# Altium PCB PCB1.PcbDoc
Units mil, origin at the board's own origin, x right, y up, seen from the top; angles counter-clockwise.
Board outline 2325 x 1445 mil, 2 copper layers (Top Layer, Bottom Layer); 34 components, 30 nets, 151 pads, 15 vias.
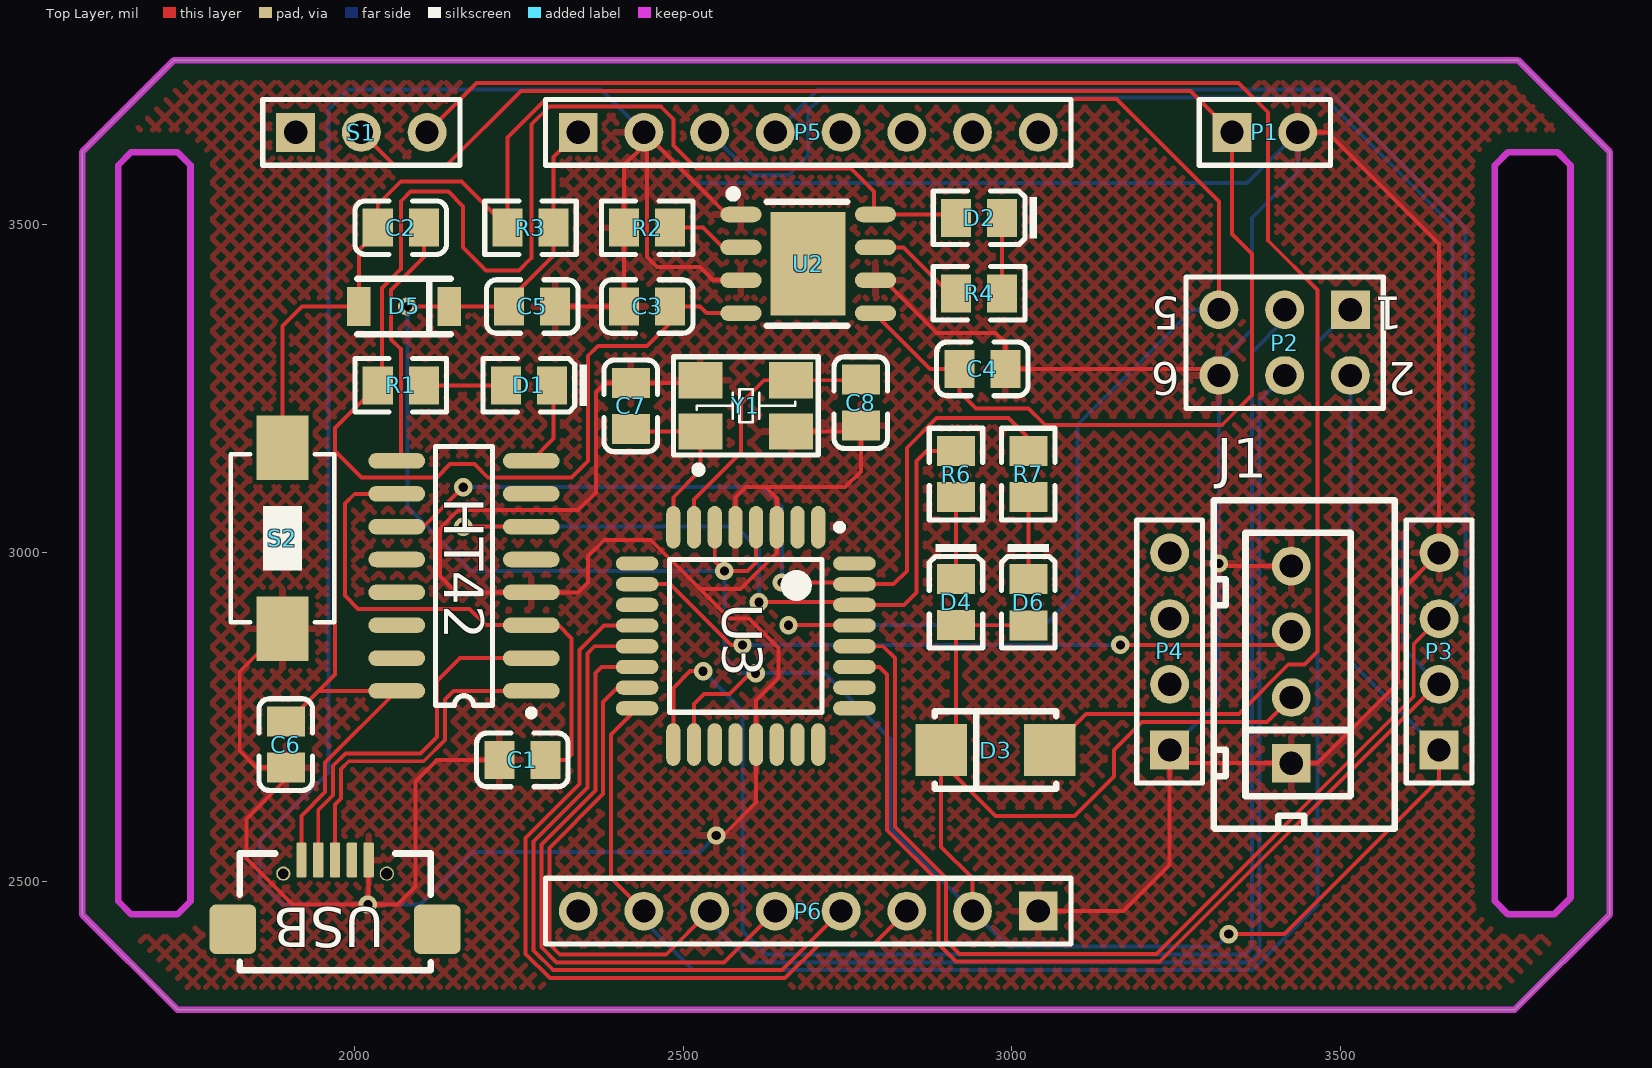
[diagram p0: Top Layer view]
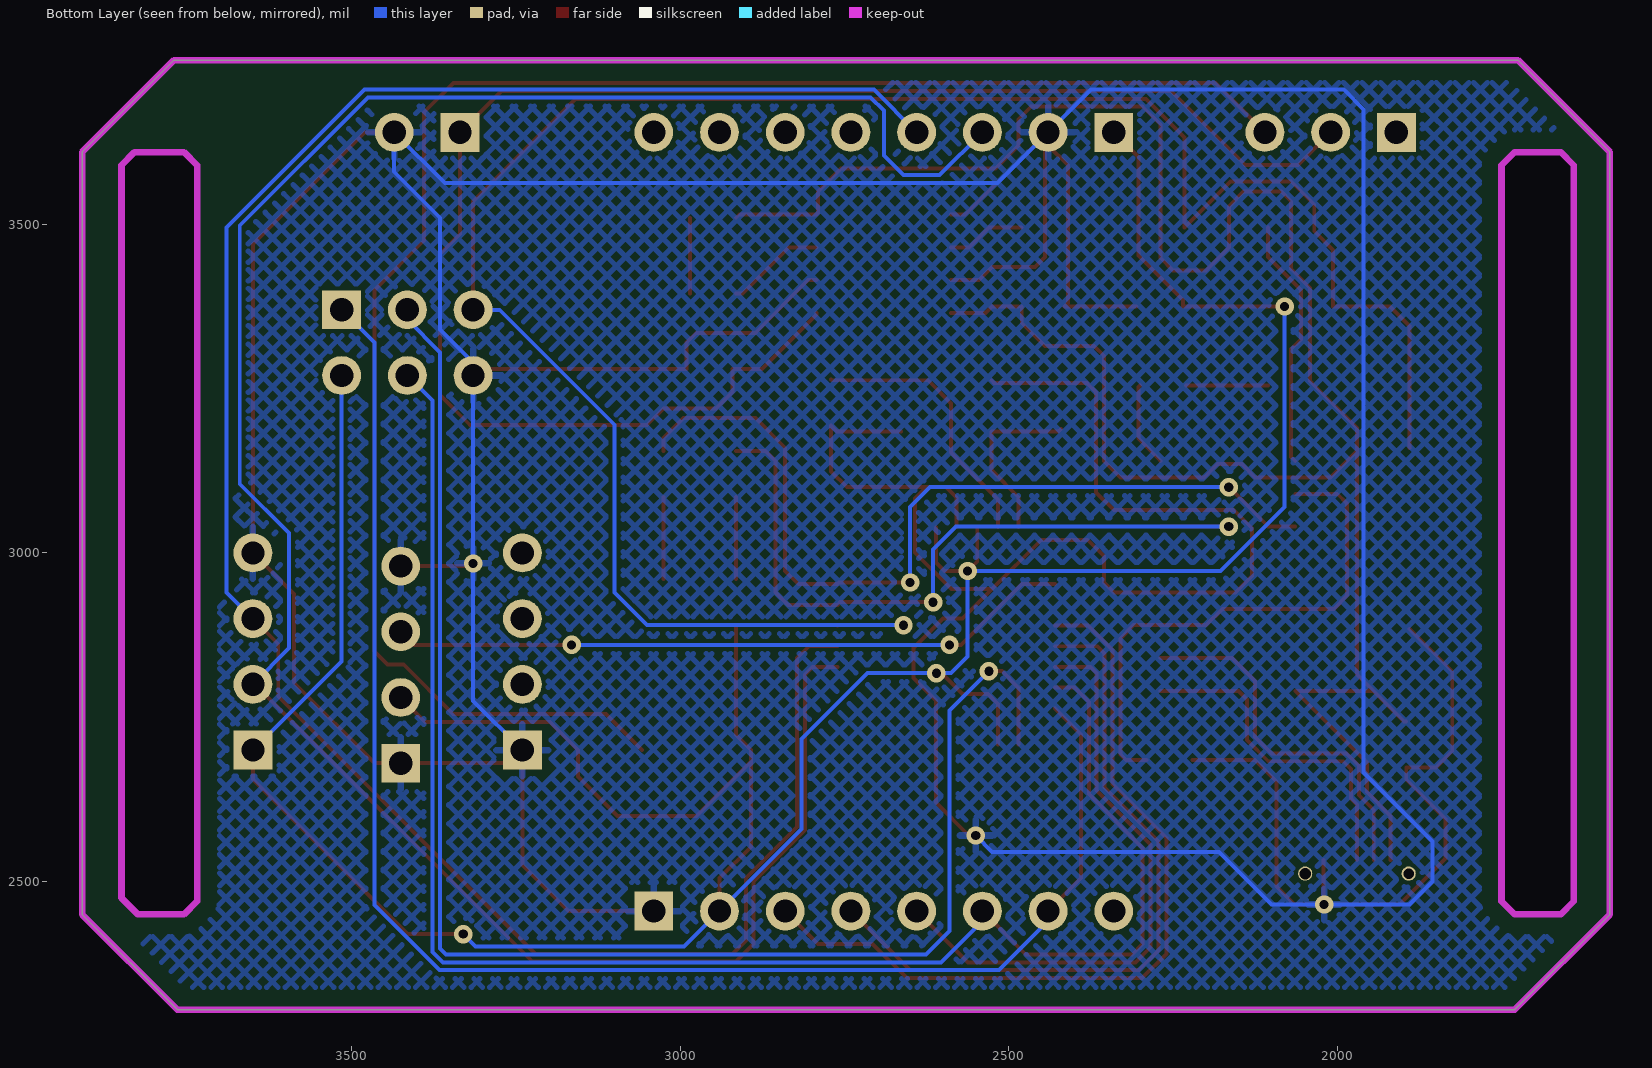
[diagram p1: Bottom Layer view, seen from below]
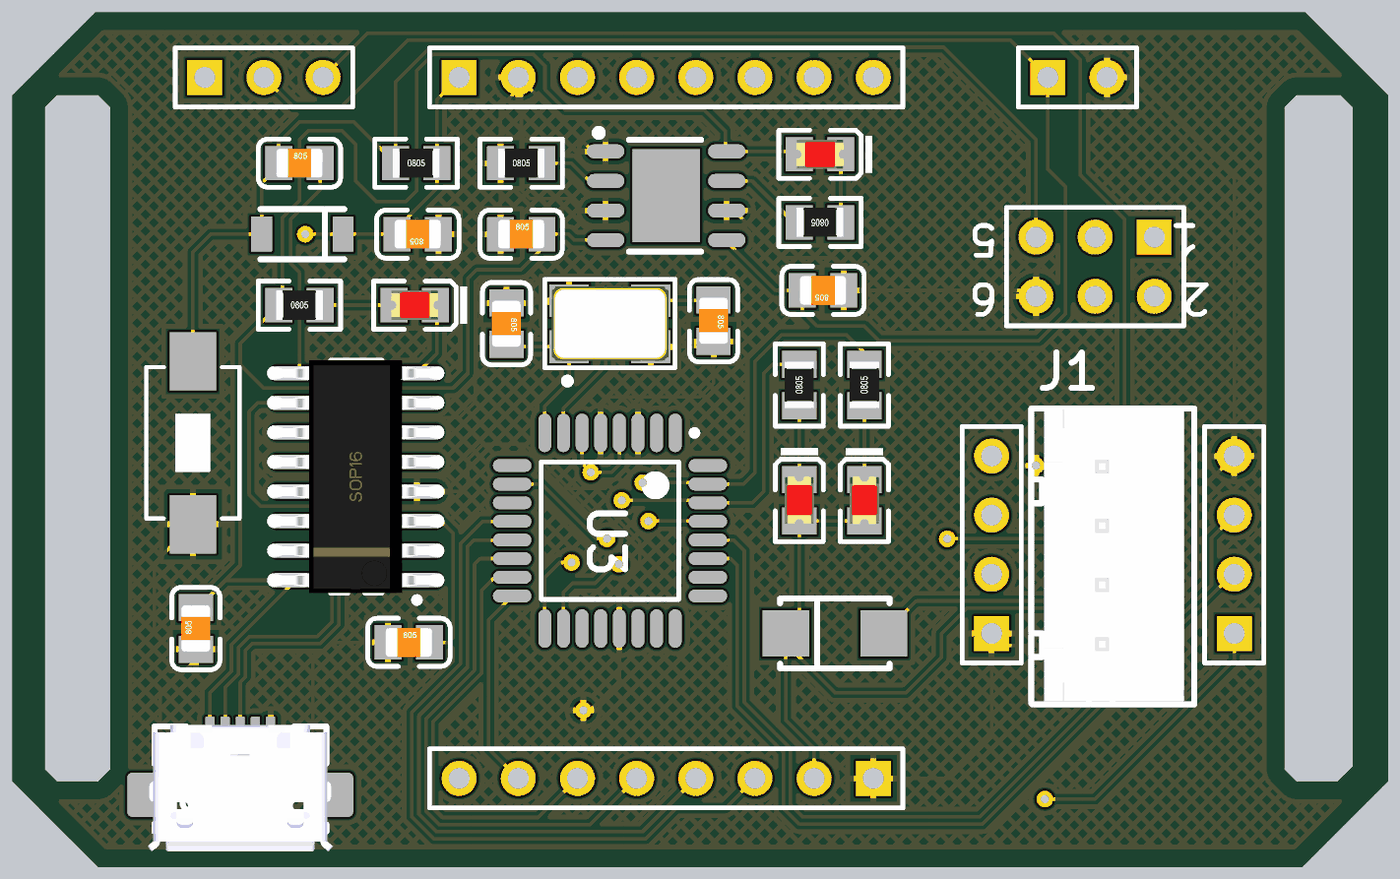
[diagram p2: 3D render of the assembled board from above, using the file's embedded part models]

## Layer stack, top to bottom
Top Solder: solder mask 0.4, Solder Resist, Dk 3.5
Top Layer: signal copper 1.4
Dielectric 1: dielectric 12.6, FR-4, Dk 4.8
Bottom Layer: signal copper 1.4
Bottom Solder: solder mask 0.4, Solder Resist, Dk 3.5

## Board outline
1585,2450 1585,3610 1725,3750 3770,3750 3910,3610 3910,2450 3765,2305 1730,2305
cut-out: 3735,2470 3755,2450 3825,2450 3850,2475 3850,3590 3830,3610 3755,3610 3735,3590
cut-out: 1660,2450 1640,2470 1640,3590 1660,3610 1730,3610 1750,3590 1750,2470 1730,2450

## Design rules (kind name [scope] priority, off if disabled: settings)
Clearance Clearance_1 [OnLayer('Keep-Out Layer')] p1: gap=25 ignorepadtopadclearanceinfootprint=TRUE
Clearance [All] p2: gap=6 ignorepadtopadclearanceinfootprint=TRUE
PolygonConnect [All] p1: connectstyle=Relief reliefconductorwidth=10 reliefentries=4 polygonreliefangle="90 Angle" airgapwidth=10
RoutingVias [All] p1: holewidth=14 width=28 viastyle="Through Hole" minholewidth=14 minwidth=28 maxholewidth=14 maxwidth=28
SolderMaskExpansion [All] p1: expansion=4
Width [All] p1: maxlimit=10 minlimit=5 preferedwidth=6
30 further rules are at their usual default settings.

## Components (designator, comment, footprint, x,y, rotation, side; value= is the part's Value field where it differs from the comment)
C1 "100nF(104) 10% 50V" 0805_C 2255,2685 r0 top
C2 "100nF(104) 10% 50V" 0805_C 2070,3495 r0 top
C3 "10uF (106) 10% 25V" 0805_C 2445,3375 r0 top
C4 "10uF (106) 10% 25V" 0805_C 2955,3280 r180 top
C5 "100pF (101) 5% 50V" 0805_C 2270,3375 r180 top
C6 "10uF (106) 10% 25V" 0805_C 1895,2708.39 r90 top
C7 "22pF (220) 5% 50V" 0805_C 2420,3223.74 r270 top
C8 "22pF (220) 5% 50V" 0805_C 2770,3228.74 r270 top
D1 "翠绿 0805" 0805_LED_S1 2265.04,3255 r180 top
D2 "红灯 0805" 0805_LED_S1 2950,3510 r180 top
D3 "SS34" SMA(DO-214AC)_S1 2975,2700 r0 top
D4 "黄灯 0805" 0805_LED_S1 2914.96,2925 r270 top
D5 "LL4148 LL-34 1206" LL-34 2075,3375 r180 top
D6 "黄灯 0805" 0805_LED_S1 3024.96,2924.96 r270 top
HT42 "HT42B534-16" SOP-16 2166.22,2965 r90 top
J1 "CON4" XH-4 3425,2680 r90 top
P1 "Header 2" HDR1X2 3335,3640 r0 top
P2 "ISP" HDR2X3 3515,3370 r180 top
P3 "Header 4" HDR1X4 3650,2700 r90 top
P4 "Header 4" HDR1X4 3240,2700 r90 top
P5 "Header 8" HDR1X8 2340,3640 r0 top
P6 "Header 8" HDR1X8 3040,2455 r180 top
R1 "1.9KΩ (1901) ±1%" 0805_R 2070,3255 r0 top
R2 "2KΩ (2001) ±1%" 0805_R 2445,3495 r0 top
R3 "10KΩ (1002) ±1%" 0805_R 2267.36,3495 r0 top
R4 "1.9KΩ (1901) ±1%" 0805_R 2950,3395 r180 top
R6 "1.9KΩ (1901) ±1%" 0805_R 2914.96,3120 r90 top
R7 "1.9KΩ (1901) ±1%" 0805_R 3024.96,3120 r90 top
S1 "SW" HDR1X3 1910,3640 r0 top
S2 "SW-PB" SW_PB2_A1 1890,3020 r0 top
U2 "TP4056" SOP-8_EP_150mil 2690,3440 r270 top
U3 "ATmega328P-AU" 32A_N 2595,2873.74 r270 top
USB "USB-Micro" "USB-Micro B" 1960,2490 r90 top
Y1 "16MHz" X5032 2595,3223.74 r0 top

## Footprints (in the part's own frame and the unit in brackets; to place one, negate y for a bottom-side part, rotate by r counter-clockwise, add the part's x,y. Pads: shape width x height; smd on the part's side, far side on the other; paste and mask are expansions set on the pad)
32A_N [mm] "Thin QFP, 32-Leads, Body 7x7mm, Pitch 0.8mm, IPC Medium Density"
  oval 1.65x0.55 smd: 1(-4.2,2.8) 2(-4.2,2) 3(-4.2,1.2) 4(-4.2,0.4) 5(-4.2,-0.4) 6(-4.2,-1.2) 7(-4.2,-2) 8(-4.2,-2.8) 17(4.2,-2.8) 18(4.2,-2) 19(4.2,-1.2) 20(4.2,-0.4) 21(4.2,0.4) 22(4.2,1.2) 23(4.2,2) 24(4.2,2.8)
  oval 0.55x1.65 smd: 9(-2.8,-4.2) 10(-2,-4.2) 11(-1.2,-4.2) 12(-0.4,-4.2) 13(0.4,-4.2) 14(1.2,-4.2) 15(2,-4.2) 16(2.8,-4.2) 25(2.8,4.2) 26(2,4.2) 27(1.2,4.2) 28(0.4,4.2) 29(-0.4,4.2) 30(-1.2,4.2) 31(-2,4.2) 32(-2.8,4.2)
  silkscreen extent -4.32,-2.95 2.95,3.75, body extent -3.5,-3.5 3.5,3.5, height 1.2
0805_C [mm]
  rect 1.16x1.47 smd: 1(-0.89,0) 2(0.89,0)
  silkscreen extent -1.77,-1.04 1.77,1.04, body extent -1,-0.62 1,0.63, height 0.77
0805_LED_S1 [mm]
  rect 1.16x1.47 smd: A(0.89,0) K(-0.89,0)
  silkscreen extent -2.25,-1.04 1.77,1.03, body extent -1.01,-0.62 1.01,0.62, height 1.1
0805_R [mm]
  rect 1.16x1.47 smd: 1(-0.89,0) 2(0.89,0)
  silkscreen extent -1.77,-1.04 1.77,1.03, body extent -1,-0.62 1,0.63, height 0.49
HDR1X2 [mm] "Connector; Header; 2 Position"
  rect 1.5x1.5 hole 0.9: 1(0,0)
  round 1.5 hole 0.9: 2(2.54,0)
  silkscreen extent -1.27,-1.27 3.81,1.27
HDR1X3 [mm] "Connector; Header; 3 Position"
  rect 1.5x1.5 hole 0.9: 1(0,0)
  round 1.5 hole 0.9: 2(2.54,0) 3(5.08,0)
  silkscreen extent -1.27,-1.27 6.35,1.27
HDR1X4 [mm] "Connector; Header; 4 Position"
  rect 1.5x1.5 hole 0.9: 1(0,0)
  round 1.5 hole 0.9: 2(2.54,0) 3(5.08,0) 4(7.62,0)
  silkscreen extent -1.27,-1.27 8.89,1.27
HDR1X8 [mm] "Connector; Header; 8 Position"
  rect 1.5x1.5 hole 0.9: 1(0,0)
  round 1.5 hole 0.9: 2(2.54,0) 3(5.08,0) 4(7.62,0) 5(10.16,0) 6(12.7,0) 7(15.24,0) 8(17.78,0)
  silkscreen extent -1.27,-1.27 19.05,1.27
HDR2X3 [mm] "Connector; Header; 3x2 Position"
  rect 1.5x1.5 hole 0.9: 1(0,0)
  round 1.5 hole 0.9: 2(0,2.54) 3(2.54,0) 4(2.54,2.54) 5(5.08,0) 6(5.08,2.54)
  silkscreen extent -1.27,-1.27 6.35,3.81
LL-34 [mm]
  rect 0.9x1.5 smd: 1(1.75,0) 2(-1.75,0)
  silkscreen extent -1.8,-1.08 1.8,1.08
SMA(DO-214AC)_S1 [mm]
  rect 2x2 smd: 1(2.1,0) 2(-2.1,0)
  silkscreen extent -2.35,-1.5 2.35,1.5
SOP-8_EP_150mil [mm]
  rect 4x2.9 smd: 0(0,0)
  oval 0.6x1.6 smd: 1(-1.905,-2.6) 2(-0.635,-2.6) 3(0.635,-2.6) 4(1.905,-2.6) 5(1.905,2.6) 6(0.635,2.6) 7(-0.635,2.6) 8(-1.905,2.6)
  silkscreen extent -2.85,-3.05 2.4,1.5
SOP-16 [mm]
  oval 0.6x2.2 smd: 1(-4.445,-2.6) 2(-3.175,-2.6) 3(-1.905,-2.6) 4(-0.635,-2.6) 5(0.635,-2.6) 6(1.905,-2.6) 7(3.175,-2.6) 8(4.445,-2.6) 9(4.445,2.6) 10(3.175,2.6) 11(1.905,2.6) 12(0.635,2.6) 13(-0.635,2.6) 14(-1.905,2.6) 15(-3.175,2.6) 16(-4.445,2.6)
  silkscreen extent -5.42,-2.72 5,1.1, body extent -5,-3.78 5,3.83, height 1.68
SW_PB2_A1 [mm]
  rect 2x2.5 smd: 1(0,3.556) 2(0,-3.444)
  silkscreen extent -2,-3.19 2,3.31, body extent -2.03,-3.17 2.03,3.3, height 1.2
"USB-Micro B" [mm]
  round 0.55 hole 0.4: 0(0.558,1.746)
  round 0.55 hole 0.45: 0(0.558,-2.254)
  rrect25% 1.35x0.4 smd: 1(1.083,-1.554) 2(1.083,-0.904) 3(1.083,-0.254) 4(1.083,0.396) 5(1.083,1.046)
  rrect25% 1.9x1.8 smd: 6(-1.592,3.696) 6(-1.592,-4.204)
  silkscreen extent -3.18,-3.95 1.34,3.43, body extent -4.03,-4.24 1.4,3.74, height 2.77
X5032 [mil]
  rect 66.93x55.12 smd: 1(-69,-39) 2(69,-39) 3(69,39) 4(-69,39)
  silkscreen extent -110,-102 110,75, body extent -98,-63 98,63, height 39
XH-4 [mm]
  rect 1.5x1.5 hole 0.9: 1(0,0)
  round 1.5 hole 0.9: 2(2.54,0) 3(5.08,0) 4(7.62,0)
  silkscreen extent -2.54,-4 10.16,3, body extent -2.4,-3.56 10.12,2.44, height 7

## Part data
C1 C2: library part "0805 100nF(104) 10% 50V", "贴片电容", Package=0805, SuppliersPartNumber=C49678, ComponentLink1Description=供应商, ComponentLink1URL=http://www.szlcsc.com/product/details_50686.html, Supplier=LC
C3 C4 C6: library part "0805 10uF (106) 10% 25V", "贴片电容", Package=0805, SuppliersPartNumber=C15850, ComponentLink1Description=供应商, ComponentLink1URL=http://www.szlcsc.com/product/details_16532.html, Supplier=LC
C5: library part "0805 100pF (101) 5% 50V", "贴片电容", Package=0805, SuppliersPartNumber=C1790, ComponentLink1Description=供应商, ComponentLink1URL=http://www.szlcsc.com/product/details_2142.html, Supplier=LC
C7 C8: library part "0805 22pF (220) 5% 50V", "贴片电容", Package=0805, SuppliersPartNumber=C1804, ComponentLink1Description=供应商, ComponentLink1URL=http://www.szlcsc.com/product/details_2156.html, Supplier=LC
D1: library part "0805 翠绿", "发光二极管", Package=0805, SuppliersPartNumber=C2297, ComponentLink1Description=供应商, ComponentLink1URL=http://www.szlcsc.com/product/details_2670.html, Supplier=LC
D2: library part "0805 红灯", "发光二极管", Package=0805, SuppliersPartNumber=C2295, ComponentLink1Description=供应商, ComponentLink1URL=http://www.szlcsc.com/product/details_2668.html, Supplier=LC
D3: library part "SMA(DO-214AC) SS210", "二极管", Package=SMA(DO-214AC), SuppliersPartNumber=C14996, ComponentLink1Description=供应商, ComponentLink1URL=http://www.szlcsc.com/product/details_15669.html, Supplier=LC
D4 D6: library part "0805 黄灯", "发光二极管", Package=0805, SuppliersPartNumber=C2296, ComponentLink1Description=供应商, ComponentLink1URL=http://www.szlcsc.com/product/details_2669.html, Supplier=LC
D5: library part "LL-34 LL4148 LL-34 1206", "开关二极管", Package=LL-34, SuppliersPartNumber=C9808, ComponentLink1Description=供应商, ComponentLink1URL=http://www.szlcsc.com/product/details_10338.html, Supplier=LC
HT42: "USB_COM"
J1: "Connector"
P1: "Header, 2-Pin", LatestRevisionDate=17-Jul-2002, LatestRevisionNote="Re-released for DXP Platform.", Publisher="Altium Limited"
P2: library part "Header 3X2", "Header, 3-Pin, Dual row", LatestRevisionDate=17-Jul-2002, LatestRevisionNote="Re-released for DXP Platform.", Publisher="Altium Limited"
P3 P4: "Header, 4-Pin", LatestRevisionDate=17-Jul-2002, LatestRevisionNote="Re-released for DXP Platform.", Publisher="Altium Limited"
P5 P6: "Header, 8-Pin", LatestRevisionDate=17-Jul-2002, LatestRevisionNote="Re-released for DXP Platform.", Publisher="Altium Limited"
R1 R4: library part "0805 1.8KΩ (1801) 1%", "贴片电阻", Package=0805, SuppliersPartNumber=C17398, ComponentLink1Description=供应商, ComponentLink1URL=http://www.szlcsc.com/product/details_18086.html, Supplier=LC
R2: library part "0805 2KΩ (2001) 1%", "贴片电阻", Package=0805, SuppliersPartNumber=C17604, ComponentLink1Description=供应商, ComponentLink1URL=http://www.szlcsc.com/product/details_18292.html, Supplier=LC
R3: library part "0805 10KΩ (1002) 1%", "贴片电阻", Package=0805, SuppliersPartNumber=C17414, ComponentLink1Description=供应商, ComponentLink1URL=http://www.szlcsc.com/product/details_18102.html, Supplier=LC
R6 R7: library part "0805 1.5KΩ (1501) 1%", "贴片电阻", Package=0805, SuppliersPartNumber=C4310, ComponentLink1Description=供应商, ComponentLink1URL=http://www.szlcsc.com/product/details_4717.html, Supplier=LC
S1: "Switch", Code_IPC=SOT26A-6, Code_JEITA=SC-74, LatestRevisionDate=29-May-2009, LatestRevisionNote="IPC-7351 Footprint Added.", PackageDescription="6-Pin SOT-23 Package 0.95 mm Pitch, 2.7 mm Lead Span", PackageReference=SOT23-6, PackageVersion=Mar-2001, Published=24-Mar-1999, Publisher="Altium Limited"
S2: "微动开关", LatestRevisionDate=17-Jul-2002, LatestRevisionNote="Re-released for DXP Platform.", PackageReference=SPST-2, Published=24-Mar-1999, Publisher="Altium Limited"
U2: library part TP4056_[C16581], "电池电源管理", Package=SOP-8_EP_150mil, SuppliersPartNumber=C16581, ComponentLink1Description=供应商, ComponentLink1URL=http://www.szlcsc.com/product/details_17264.html, Supplier=LC
U3: "8-bit AVR Microcontroller, 32KB Flash, 1KB EEPROM, 2KB SRAM, 32-pin TQFP, Industrial Grade (-40癈 to 85癈)", Supplier Part Number 1=ATMEGA328P-AU-ND, Code_JEDEC=MS-026-ABA, ComponentLink1Description="Manufacturer Link", ComponentLink1URL=http://www.atmel.com/products/avr/default.asp?, ComponentLink2Description="ATmega48A/48PA/88A/88PA/168A/168PA/328/328P Datasheet", ComponentLink2URL=http://www.atmel.com/dyn/resources/prod_documents/8271.pdf, ComponentLink3Description="ATmega48A/48PA/88A/88PA/168A/168PA/328/328P Summary", ComponentLink3URL=http://www.atmel.com/dyn/resources/prod_documents/8271S.pdf, ComponentLink4Description="Atmel.com Home", ComponentLink4URL=http://www.atmel.com, DatasheetVersion="revA, Jan-2010", PackageDescription="32-Lead, 7x7x1.0 mm Body, 0.8mm Lead Pitch, Thin Profile Plastic Quad Flat Package (TQFP)", PackageReference=32A, PackageVersion="revB, Oct-2001", Published=1-Apr-2010, Publisher="Altium Limited", Supplier 1=Digi-Key, Supplier 2=Farnell, Supplier 3=Mouser, Supplier Part Number 2=1715486, Supplier Part Number 3=556-ATMEGA328P-AU
Y1: library part XTAL_SMD2

## Via types
v1: diameter 28, hole 14, Top Layer to Bottom Layer, 15 vias

## Nets (pads, with @x,y where several pads share a name; then routed paths per layer and width w, separated by ;. In a path a pad name is that pad's centre, name@x,y a point inside that pad or via, vN(x,y) a via of type N, cw(c..) or ccw(c..) an arc to the next point about the centre after c; other vN are vias at no path point)
+5: C3.2 C6.2 D2.A HT42.16 R1.1 U2.4 U2.8 USB.5 | length 3440.3
  Top Layer w6: C6.2 1898.42,2743.43 1945,2790 ; USB.5 1918.82,2600 1955,2636.18 1955,2681.14 HT42.16 1945,2790 ; C3.2 2480.04,3350.04 2445,3315 2370,3315 2355,3300 2355,3140 2330,3115 2202.32,3115 2182.32,3135 2145,3135 2125,3115 2010,3115 1970,3155 ; C3.2@2485.08,3375 2525,3375 2535,3365 U2.4 ; D2.A 2909.96,3515 U2.8 2790,3517.36 2790,3549.84 2754.84,3585 2520,3585 2485.08,3619.92 2485.08,3659.92 2466,3679 2295.97,3679 2268.58,3651.61 2268.58,3448.58 2250,3430 2200,3430 2165,3465 2165,3527.47 2142.47,3550 2085,3550 2070,3535 2070,3431.97 2041.26,3403.23 2041.26,3261.3 R1.1 1970,3190.04 1970,3155 ; 1945,2790 1970,2815 1970,3155
D8: P6.3 U3.12 | length 1236.7
  Top Layer w6: U3.12 2379.49,2889.49 2342,2852 2342,2648.13 2260,2566.13 2260,2390 2297,2353 2654.97,2353 2706.97,2405 2790,2405 P6.3
D9: P6.4 U3.13 | length 1083.9
  Top Layer w6: U3.13 2364.96,2857.99 2354,2847.03 2354,2643.16 2272,2561.16 2272,2394.97 2301.97,2365 2650,2365 P6.4
D10: P6.5 U3.14 | length 916.4
  Top Layer w6: U3.14 2375.5,2826.5 2366,2817 2366,2638.19 2284,2556.19 2284,2399.94 2306.94,2377 2562,2377 P6.5
DIN: J1.3 U3.10 | length 1041.9
  Top Layer w6: U3.10 2480,2952.48 2572.48,2860 v1(2590,2860) ; v1(3165,2860) 3405,2860 J1.3
  Bottom Layer w6: v1(2590,2860) v1(3165,2860)
GND: C1.1 C3.1 C4.1 C5.1 C6.1 C7.1 C8.2 HT42.4 J1.1 J1.4 P1.2 P2.6 P3.4 P4.1 P5.2 P6.1 R2.1 S2.2 U2.1 U2.3 U2.6 U3.3 U3.5 U3.21 USB.1 Y1.2 Y1.4 | length 11450.1
  Top Layer w6: S2.2 1825,2819.41 1825,2698.35 1850,2673.35 C6.1 1895,2655 1835,2595 1835,2535 1905,2465 v1(2020,2465) ; USB.1 2021.18,2466.18 v1(2020,2465) ; C1.1 2125,2685 2092.44,2652.44 2092.44,2492.44 2065,2465 v1(2020,2465) ; C5.1 C3.1 2415,3375 2409.96,3380.04 R2.1 2409.96,3590 2440,3620.04 P5.2 ; Y1.4 2522.04,3258.78 C7.1 2381.1,3258.78 2367,3244.68 2367,3092 2340,3065 2157.47,3065 2130,3037.53 2130,2965 2155,2940 HT42.4 2340,2940 2355,2955 2355,2995 2380,3020 2450,3020 2525,2945 ; v1(2550,2570) 2560.75,2570 2610.75,2620 U3.21 2610.75,2775.75 2645,2810 2645,2855 2600,2900 2570,2900 2525,2945 ; U3.5 2579.25,3084.25 2595,3100 2625,3100 ; U2.3 2545,3415 2525,3435 2460,3435 2445,3450 2445,3635 P5.2 ; U2.1 2566,3515 2441,3640 P5.2 ; Y1.2 2761.04,3184.74 C8.2 2770,3123.96 2746.04,3100 2625,3100 ; U2.6 2805.04,3415 2885.04,3335 2975,3335 2990.04,3319.96 C4.1 3305,3280 P2.6 ; P6.1 3170,2455 3240,2525 P4.1 3260,2680 J1.1 3465,2680 3587.47,2802.47 3587.47,2937.47 P3.4 3650,3470 3480,3640 P1.2 ; v1(3315,2983.98) 3318.98,2980 J1.4 ; 2525,2945 2586.97,2945 2642.24,3000.27 U3.3 2642.24,3082.76 2625,3100
  Bottom Layer w6: v1(2550,2570) 2525,2545 2180,2545 2100,2465 v1(2020,2465) 1890,2465 1855,2500 1855,2561.18 1960,2666.18 1960,3675 1990,3705 2375,3705 P5.2 2517,3563 3358,3563 P1.2 3435,3580 3365,3510 3365,3340 3315,3290 P2.6 v1(3315,2983.98) 3315,2775 P4.1
MISO: P2.1 P6.7 U3.16 | length 2384.4
  Top Layer w6: U3.16 2390,2723.86 2390,2505 P6.7
  Bottom Layer w6: P6.7 2440,2440 2515,2365 3366,2365 3465,2464 3465,3320 P2.1
MOSI: P2.4 P6.6 U3.15 | length 2518.2
  Top Layer w6: U3.15 2400,2795 2378,2773 2378,2633.22 2296,2551.22 2296,2404.91 2311.91,2389 2474,2389 P6.6
  Bottom Layer w6: P6.6 2540,2440 2603,2377 3361.03,2377 3377,2392.97 3377,3232 P2.4
NetC1_2: C1.2 HT42.3 HT42.10 | length 817
  Top Layer w6: HT42.10 2000,3090 1985,3075 1985,2935 2005,2915 2174.49,2915 2199.49,2890 HT42.3 2310,2890 2330,2870 2330,2693.39 2321.61,2685 C1.2
NetC4_2: C4.2 P1.1 S1.2 U2.5 | length 2514.6
  Top Layer w6: S1.2 2060,3590 2140,3590 2253,3703 3272,3703 P1.1 3335,3485 3365,3455 3365,3240 3320,3195 3050,3195 3025,3220 2945,3220 2919.96,3245.04 C4.2 2875,3280 2792.36,3362.64 2792.36,3363.82 U2.5
NetC7_2: C7.2 U3.8 Y1.1 | length 270.4
  Top Layer w6: C7.2 2423.96,3184.74 Y1.1 2526,3126 2484.76,3084.76 U3.8
NetC8_1: C8.1 U3.7 Y1.3 | length 415.4
  Top Layer w6: U3.7 2516.26,3081.26 2587.64,3152.64 2587.64,3227.64 2622.74,3262.74 Y1.3 2768.96,3262.74 C8.1
NetD1_A: D1.A R1.2 | length 125
  Top Layer w6: R1.2 D1.A
NetD1_K: D1.K HT42.8 | length 130
  Top Layer w6: HT42.8 2302.4,3173.82 2302.4,3252.68 D1.K
NetD2_K: D2.K R4.1 | length 115
  Top Layer w6: R4.1 D2.K
NetD3_1: D3.1 S1.3 | length 2650.2
  Top Layer w6: S1.3 2185,3715 3345,3715 3390,3670 3390,3475 3465,3400 3465,2850 3445,2830 3420.51,2830 3345.51,2755 3112.68,2755 D3.1
NetD4_K: D4.K R6.1 | length 124.9
  Top Layer w6: D4.K R6.1
NetD6_K: D6.K R7.1 | length 125
  Top Layer w6: D6.K R7.1
NetHT42_1: HT42.1 USB.3 | length 517.4
  Top Layer w6: USB.3 1970,2617.24 1979,2626.24 1979,2671.2 1990.8,2683 2104.97,2683 2137,2715.03 2137,2777 2150,2790 HT42.1
NetHT42_2: HT42.2 USB.4 | length 572.1
  Top Layer w6: USB.4 1944.41,2608.62 1967,2631.21 1967,2676.17 1985.83,2695 2100,2695 2125,2720 2125,2805 2160,2840 HT42.2
NetR2_2: R2.2 U2.2 | length 120
  Top Layer w6: R2.2 2530,3495 2560,3465 U2.2
NetR4_2: R4.2 U2.7 | length 151.6
  Top Layer w6: U2.7 2835,3465 2905,3395 R4.2
RESET: C2.1 D5.1 P2.5 R3.1 S2.1 U3.29 | length 3299
  Top Layer w6: S2.1 1890,3345 1920,3375 D5.1 2006.1,3461.14 2034.96,3490 C2.1 2034.96,3529.96 2070,3565 2162.32,3565 R3.1 2232.32,3632.32 2291,3691 3159,3691 3315,3535 P2.5 ; v1(2660,2890) 2759.84,2890 U3.29
  Bottom Layer w6: v1(2660,2890) 3050,2890 3100,2940 3100,3195 3275,3370 P2.5
RST: C2.2 HT42.9 | length 384.5
  Top Layer w6: HT42.9 2070,3146.14 2070,3310 2054.97,3325.03 2054.97,3399.97 2105.04,3450.04 C2.2
RXD: HT42.11 R7.2 U3.31 | length 1361.3
  Top Layer w6: HT42.11 2105,3040 v1(2165,3100) ; v1(2650,2955) 2757.83,2955 U3.31 2820,2952.48 2840,2972.48 2840,3160 2885,3205 2995,3205 3024.96,3175.04 R7.2
  Bottom Layer w6: v1(2165,3100) 2620,3100 2650,3070 v1(2650,2955)
SCK: P2.3 U3.17 | length 2348.3
  Top Layer w6: U3.17 2484.76,2794.76 2510,2820 v1(2530,2820)
  Bottom Layer w6: v1(2530,2820) 2590,2760 2590,2425 2626,2389 3356.06,2389 3365,2397.94 3365,3305 3415,3355 P2.3
SCL: P3.3 P5.4 U3.28 | length 3323.3
  Top Layer w6: U3.28 2804.02,2857.99 2822.01,2840 2822.01,2582.99 2900,2505 2900,2410 2920,2390 3220,2390 3611.47,2781.47 3611.47,2861.47 P3.3
  Bottom Layer w6: P5.4 2705,3705 3480,3705 3690,3495 3690,2940 P3.3
SDA: P3.2 P5.3 U3.27 | length 3519.9
  Top Layer w6: U3.27 2798.5,2826.5 2810.01,2814.99 2810.01,2578.02 2888,2500.03 2888,2405.03 2915.03,2378 3224.97,2378 P3.2@3646.97,2800
  Bottom Layer w6: P5.3 2605,3575 2660,3575 2690,3605 2690,3673.03 2709.97,3693 3475.03,3693 3670,3498.03 3670,3105 3595,3030 3595,2855 P3.2
TXD: HT42.6 R6.2 U3.30 | length 1163.8
  Top Layer w6: v1(2165,3040) HT42.6 ; v1(2615,2925) 2756.34,2925 U3.30 2835.98,2920.98 2855,2940 2855,3140 2870.04,3155.04 R6.2
  Bottom Layer w6: v1(2165,3040) 2580,3040 2615,3005 v1(2615,2925)
VCC: C5.2 D3.2 D4.A D5.2 D6.A J1.2 P2.2 P3.1 P5.1 P6.2 R3.2 U3.4 U3.6 U3.18 | length 5141.8
  Top Layer w6: v1(2080,3375) D5.2 C5.2 2234.96,3384.96 2302.4,3452.4 R3.2 2302.4,3602.4 P5.1 ; U3.18 2516.26,2770 2531.26,2785 2570,2785 2602,2817 v1(2610,2817) ; U3.6 2547.76,2987.24 v1(2562.52,2972.48) 2597.48,2972.48 2610.75,2985.75 U3.4 ; P6.2 2940,2505 2892.32,2552.68 D3.2@2892.32,2682.72 ; D6.A 3024.92,2889.96 D4.A 2914.96,2722.64 D3.2 D3.2@2892.32,2682.72 ; v1(3330,2420) 3415,2420 3650,2655 P3.1 ; J1.2 3388,2743 3198,2743 3155,2700 3155,2660 3095,2600 2975.04,2600 D3.2@2892.32,2682.72
  Bottom Layer w6: v1(2080,3375) 2080,3070 2177.52,2972.48 v1(2562.52,2972.48) 2562.52,2842.48 2588,2817 v1(2610,2817) 2715,2817 2815,2717 2815,2580 P6.2 2994,2401 3311,2401 v1(3330,2420) ; P2.2 3515,2835 P3.1
pads on no net: HT42.5 HT42.7 HT42.12 HT42.13 HT42.14 HT42.15 P4.2 P4.3 P4.4 P5.5 P5.6 P5.7 P5.8 P6.8 S1.1 U2.0 U3.1 U3.2 U3.9 U3.11 U3.19 U3.20 U3.22 U3.23 U3.24 U3.25 U3.26 U3.32 USB.0 USB.2 USB.6

## Polygon pours and split planes (outlines as drawn)
GND on Top Layer "GND_L01_P006" (hatched 45Degree grid 20 track 8, remove dead copper, pour order 6): 1585,2450 1585,3610 1725,3750 3770,3750 3910,3610 3910,2450 3765,2305 1730,2305
GND on Bottom Layer "GND_L02_P007" (hatched 45Degree grid 20 track 8, remove dead copper, pour order 7): 1585,2450 1585,3610 1725,3750 3770,3750 3910,3610 3910,2450 3765,2305 1730,2305

## Keep-outs
Keep-Out Layer:
  lines w10: 1585,2450 1730,2305 3765,2305 3910,2450 3910,3610 3770,3750 1725,3750 1585,3610 1585,2450 ; 1640,2470 1660,2450 1730,2450 1750,2470 1750,3590 1730,3610 1660,3610 1640,3590 1640,2470 ; 3735,2470 3755,2450 3825,2450 3850,2475 3850,3590 3830,3610 3755,3610 3735,3590 3735,2470

## Text inside footprints (layer, text, board x,y; h text height)
P2: Top Overlay "6" at 3255,3290 h50 r180; Top Overlay "5" at 3255,3390 h50 r180; Top Overlay "2" at 3615,3290 h50 r180; Top Overlay "1" at 3595,3390 h50 r180